# Altium PCB cap-test.PcbDoc
Units mil, origin at the board's own origin, x right, y up, seen from the top; angles counter-clockwise.
Board outline 1325 x 2400 mil, 2 copper layers (Top Layer, Bottom Layer); 16 components, 12 nets, 55 pads, 31 vias.
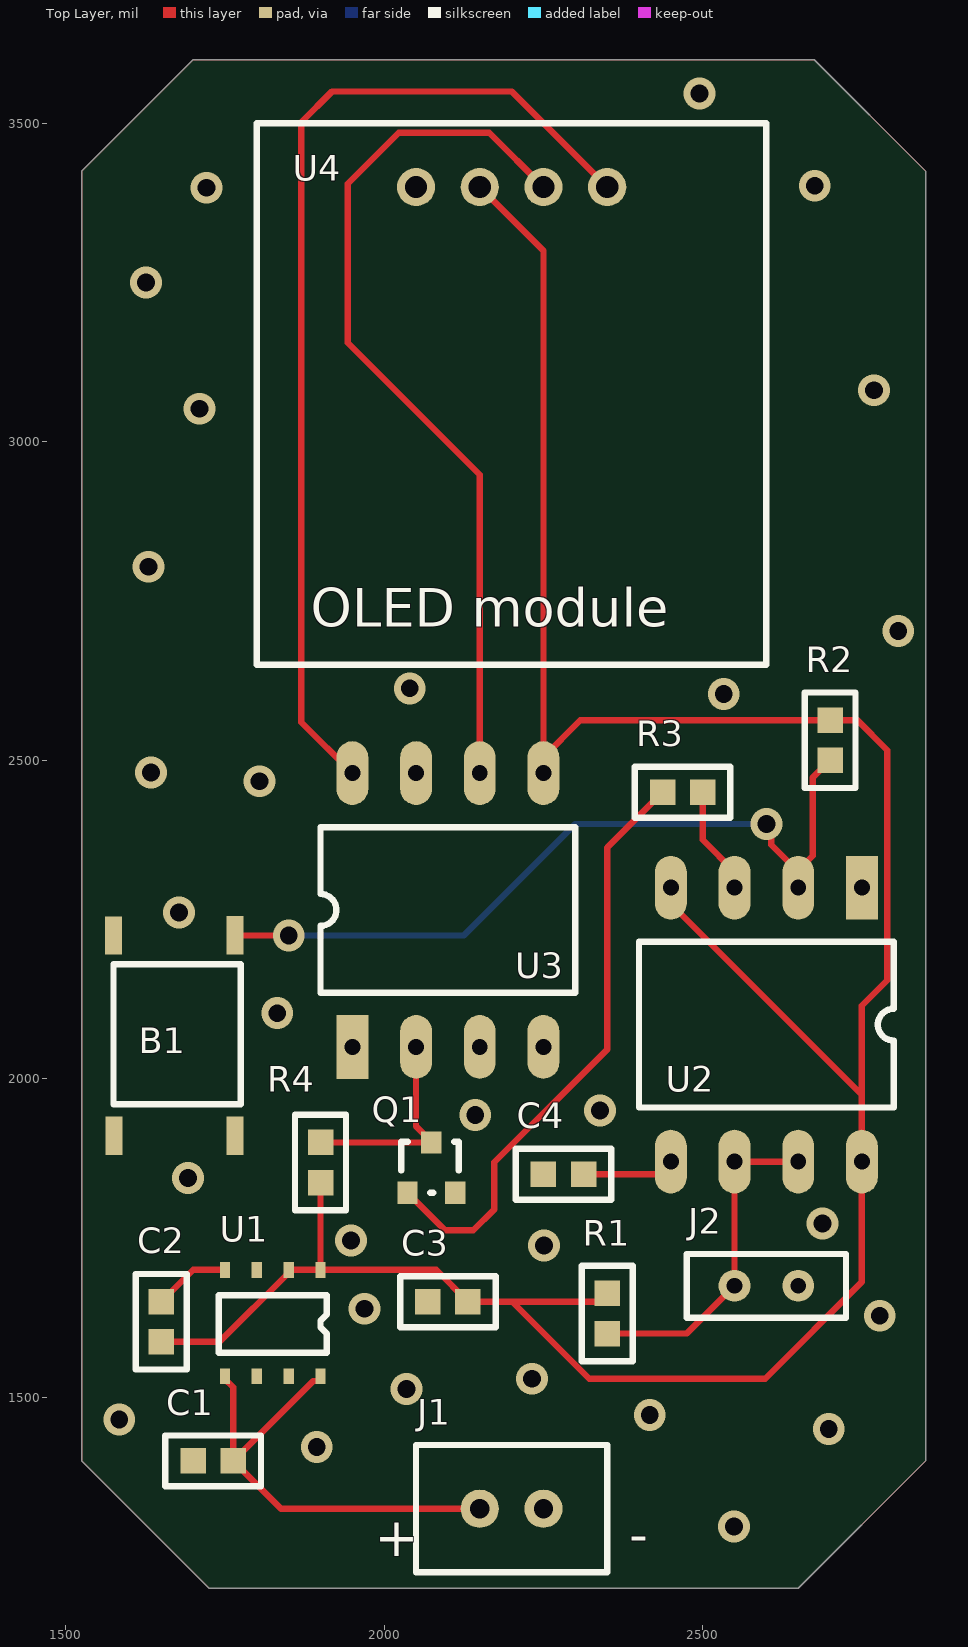
[diagram p0: Top Layer view]
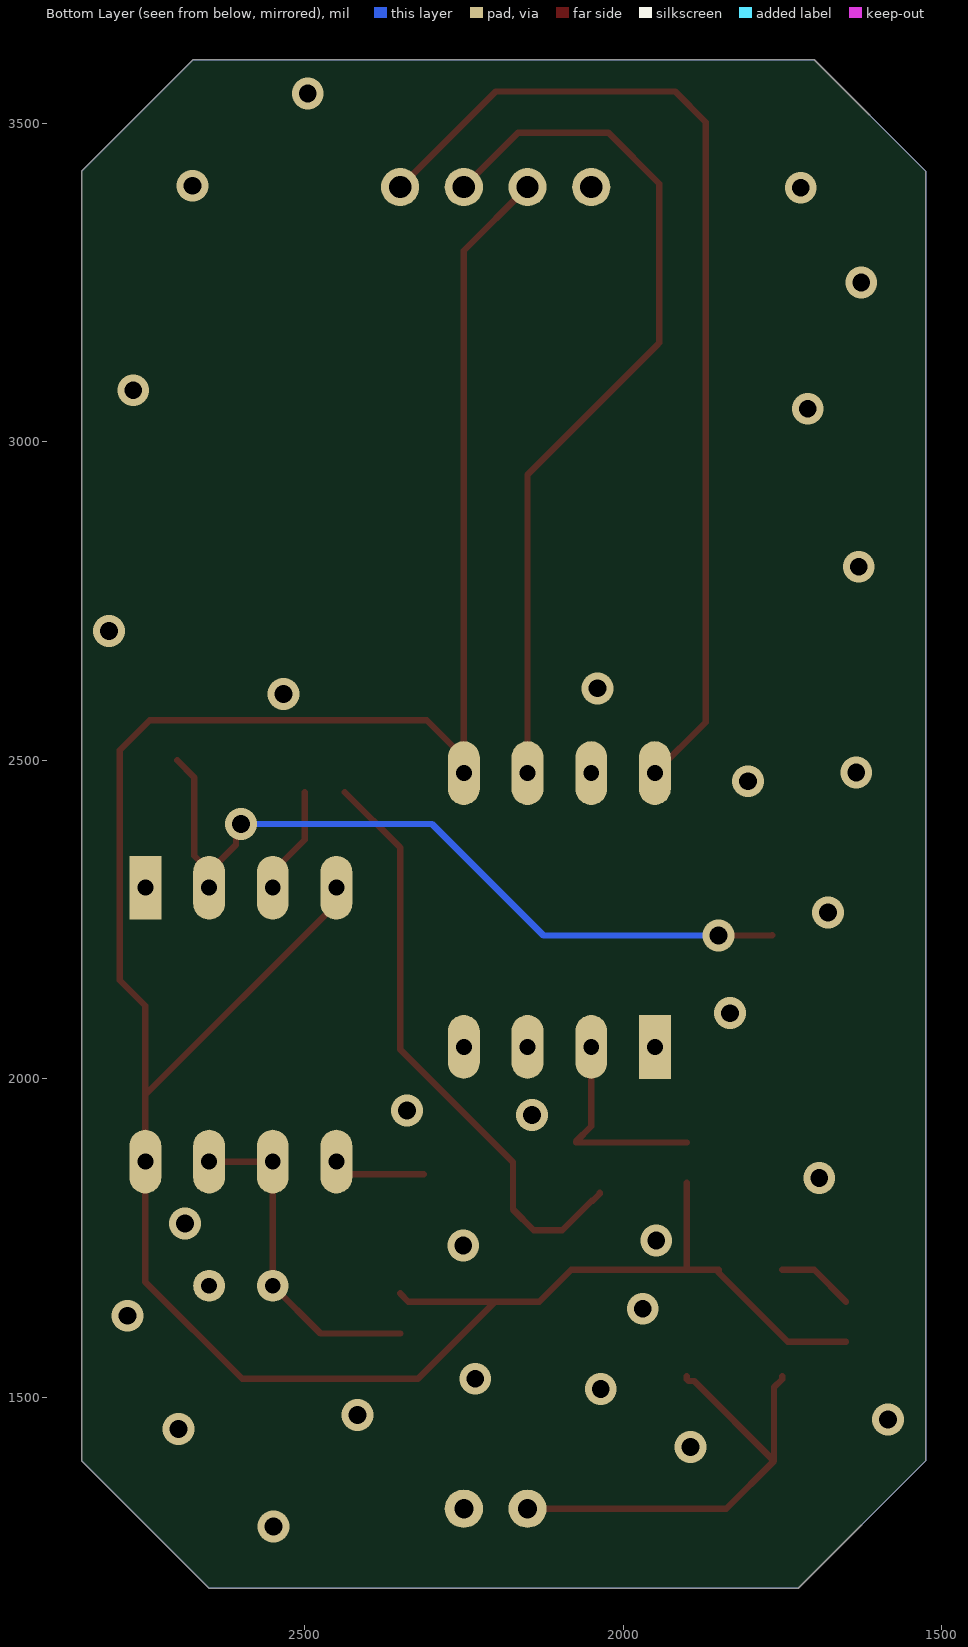
[diagram p1: Bottom Layer view, seen from below]

## Layer stack, top to bottom
Top Solder: solder mask 0.4, Solder Resist, Dk 3.5
Top Layer: signal copper 1.4
Dielectric 1: dielectric 12.6, FR-4, Dk 4.8
Bottom Layer: signal copper 1.4
Bottom Solder: solder mask 0.4, Solder Resist, Dk 3.5

## Board outline
1525,1400 1525,3425 1700,3600 2675,3600 2850,3425 2850,1400 2650,1200 1725,1200

## Design rules (kind name [scope] priority, off if disabled: settings)
Clearance [All] p1: gap=10 ignorepadtopadclearanceinfootprint=FALSE
PolygonConnect [All] p1: connectstyle=Relief reliefconductorwidth=10 reliefentries=4 polygonreliefangle="90 Angle" airgapwidth=10
RoutingVias [All] p1: holewidth=28 width=50 viastyle="Through Hole" minholewidth=28 minwidth=50 maxholewidth=28 maxwidth=50
SolderMaskExpansion [All] p1: expansion=4 istentingtop=FALSE
Width [All] p1: maxlimit=10 minlimit=10 preferedwidth=10
30 further rules are at their usual default settings.

## Components (designator, comment, footprint, x,y, rotation, side; value= is the part's Value field where it differs from the comment)
B1 "Button" Button 1575,1910 r90 top
C1 "1uF" 0603 1731.5,1400 r0 top
C2 "10nF" 0603 1650,1618.5 r270 top
C3 "10uF" 0603 2100,1650 r0 top
C4 "0.1uF" 0603 2281.5,1850 r0 top
J1 "XH2.54-2P" XH2.54-2P 2150,1325 r0 top
J2 "Testing capacitor" "2.54mm header" 2650,1675 r180 top
Q1 "BC847C" BC847C 2037,1821 r0 top
R1 "47k" 0603 2350,1631.5 r270 top
R2 "47k" 0603 2700,2531.5 r90 top
R3 "47k" 0603 2468.5,2450 r0 top
R4 "47k" 0603 1900,1868.5 r90 top
U1 "TLS205B0" TLS205B0 1900,1700 r180 top
U2 "LM555N" DIP8 2750,2300 r270 top
U3 "ATTINY85" DIP8 1950,2050 r90 top
U4 "OLED module" "OLED module" 2050,3400 r0 top

## Footprints (in the part's own frame and the unit in brackets; to place one, negate y for a bottom-side part, rotate by r counter-clockwise, add the part's x,y. Pads: shape width x height; smd on the part's side, far side on the other; paste and mask are expansions set on the pad)
"2.54mm header" [mil]
  round 50 hole 25: 1(0,0) 2(100,0)
  silkscreen extent -75,-50 175,50
0603 [mil]
  rect 40x40 smd: 1(-31.5,0) 2(31.5,0)
  silkscreen extent -75,-40 75,40
BC847C [mil] "https://jlcpcb.com/partdetail/Hongjiacheng-BC847C/C7420337"
  rect 32x35 smd paste-99999 mask+4: 1(-0.5,0) 2(74.5,0) 3(37,79)
  silkscreen extent -10,0 80,80
Button [mil] "https://jlcpcb.com/partdetail/Yiyuan-YTS1R0032CBG00/C3001435"
  rect 60x27 smd paste-99999 mask+4: 1(0.41,-0.96) 2(315,0) 3(0.41,-190.96) 4(315.41,-190.96)
  silkscreen extent 50,-200 270,0
DIP8 [mil]
  rect 100x50 hole 25: 1(0,0)
  oval 100x50 hole 25: 2(0,-100) 3(0,-200) 4(0,-300) 5(430,-300) 6(430,-200) 7(430,-100) 8(430,0)
  silkscreen extent 85,-350 345,50
"OLED module" [mil]
  round 60 hole 35: 1(0,0) 2(100,0) 3(200,0) 4(300,0)
  silkscreen extent -250,-750 550,100
TLS205B0 [mil] "https://wmsc.lcsc.com/wmsc/upload/file/pdf/v2/lcsc/2401161412_Infineon-Technologies-TLS205B0EJV50XUMA1_C3747247.pdf"
  rect 16x25 smd paste-99999 mask+4: 1(0,0) 2(50,0) 3(100,0) 4(150,0) 5(150,167) 6(100,167) 7(50,167) 8(0,167)
  silkscreen extent -10,40 160,130
XH2.54-2P [mil]
  round 60 hole 30: 1(0,0) 2(100,0)
  silkscreen extent -100,-100 200,100

## Part data
B1: "https://jlcpcb.com/partdetail/Yiyuan-YTS1R0032CBG00/C3001435"
J2: library part "2.54mm pin header female"
Q1: "https://jlcpcb.com/partdetail/Hongjiacheng-BC847C/C7420337"
R1 R2 R3 R4: "https://jlcpcb.com/partdetail/Walsin_TechCorp-WR06X4702FTL/C146207"
U1: "https://wmsc.lcsc.com/wmsc/upload/file/pdf/v2/lcsc/2401161412_Infineon-Technologies-TLS205B0EJV50XUMA1_C3747247.pdf"
U2: "https://jlcpcb.com/partdetail/Hgsemi-LM555N/C725327"
U3: "https://jlcpcb.com/partdetail/MicrochipTech-ATTINY8520PU/C965497"

## Via types
v1: diameter 50, hole 28, Top Layer to Bottom Layer, 30 vias
v2: diameter 50/50 (per signal layer), hole 28, Top Layer to Bottom Layer, 1 vias

## Nets (pads, with @x,y where several pads share a name; then routed paths per layer and width w, separated by ;. In a path a pad name is that pad's centre, name@x,y a point inside that pad or via, vN(x,y) a via of type N, cw(c..) or ccw(c..) an arc to the next point about the centre after c; other vN are vias at no path point)
5V: C2.2 C3.2 R1.1 R2.2 R4.1 U1.1 U1.2 U2.4 U2.8 U3.5 U4.2 | length 4420.4
  Top Layer w10: C2.2 1741.5,1587 1850,1695.5 U1.2 U1.1 ; R4.1 U1.1 ; U4.2 2250,3300 U3.5@2250,2505 ; U3.5 U3.5@2250,2505 ; R1.1 2337,1650 2201,1650 ; U2.4 2450,2275 2750,1975 ; U1.1 2081.5,1700 C3.2 2201,1650 ; 2201,1650 2322,1529 2598,1529 2750,1681 U2.8 2750,1975 ; U3.5@2250,2505 2308,2563 R2.2 2743,2563 2790,2516 2790,2154.85 2750,2114.85 2750,1975
9V: C1.2 J1.1 U1.5 U1.8 | length 751.2
  Top Layer w10: U1.5 1750,1528.5 1763,1515.5 C1.2 ; U1.8 1900,1528.5 1897,1525.5 1888.5,1525.5 C1.2 ; J1.1 1838,1325 C1.2
GND: B1.1 C1.1 C3.1 C4.1 J1.2 J2.1 Q1.2 U1.6 U2.1 U3.4 U4.1
  other v1: 2549,1297 1894,1422 1584,1465 2417,1472 2035,1513 2232,1529 2778,1628 1969,1639 2251,1738 1948,1746 2688,1773 1692,1844 2143,1943 2339,1950 1832,2103 1678,2261 1804,2467 1634,2481 2533,2604 2040,2613 2807,2703 1630,2804 1710,3052 2769,3081 1626,3250 1721,3399 2676,3402 2495,3547
  other v2: 2698,1450
NetB1_4: B1.4 R2.1 U2.2 | length 1248.1
  Top Layer w10: B1.4 1766.38,2225 v1(1850,2225) ; v1(2600,2400) 2607.65,2392.35 2607.65,2367.35 2650,2325 U2.2 2650,2327.28 2673,2350.28 2673,2473 R2.1
  Bottom Layer w10: v1(1850,2225) 2125,2225 2300,2400 v1(2600,2400)
NetC2_1: C2.1 U1.4 | length 120.7
  Top Layer w10: C2.1 1700,1700 U1.4
NetC4_2: C4.2 U2.5 | length 146.2
  Top Layer w10: C4.2 2431.52,1850 2450,1868.48 U2.5
NetJ2_2: J2.2 R1.2 U2.6 U2.7 | length 526.1
  Top Layer w10: R1.2 2475,1600 J2.2 U2.6 U2.7
NetQ1_1: Q1.1 R3.1 | length 939.8
  Top Layer w10: Q1.1 2036.5,1819.5 2047.5,1808.5 2049,1808.5 2095.5,1762 2140,1762 2172.75,1794.75 2172.75,1868.75 2350,2046 2350,2363 R3.1
NetR3_2: R3.2 U2.3 | length 170.7
  Top Layer w10: R3.2 2500,2375 2550,2325 U2.3
OLED_SCL: U3.6 U4.3 | length 1386.1
  Top Layer w10: U3.6 2150,2948.56 1945.93,3152.63 1943,3155.56 1943,3405.07 2022.93,3485 2165,3485 U4.3
OLED_SDA: U3.8 U4.4 | length 1617.2
  Top Layer w10: U3.8 1870,2560 1870,3502 1918,3550 2200,3550 U4.4
OUT_555: Q1.3 R4.2 U3.2 | length 333.9
  Top Layer w10: R4.2 Q1.3 2074,1901.5 2050,1925.5 U3.2
pads on no net: B1.2 B1.3 U1.3 U1.7 U3.1 U3.3 U3.7

## Polygon pours and split planes (outlines as drawn)
GND on Top Layer "NONET_L01_P000" (solid, shelved, pour order 0): 1525,3425 1525,1400 1725,1200 2650,1200 2850,1400 2850,3425 2675,3600 1700,3600 2675,3600 1700,3600
GND on Bottom Layer "NONET_L02_P001" (solid, shelved, pour order 1): 1525,3425 1525,1400 1725,1200 2650,1200 2850,1400 2850,3425 2675,3600 1700,3600 2675,3600 1700,3600

## Silkscreen, mask and mechanical layers (free items; w line width, h text height)
Top Overlay:
  text "-" at 2385,1255.01 h60
  text "+" at 1985,1250 h60